# Altium PCB EnvUnitPCB.PcbDoc (part 1 of 4)
Units mm, origin at the board's own origin, x right, y up, seen from the top; angles counter-clockwise.
Board outline 110.5 x 67 mm, 4 copper layers (TOP, GND, VCC, BOT), stack 1.586 mm thick; 184 components, 135 nets, 655 pads, 1338 vias.
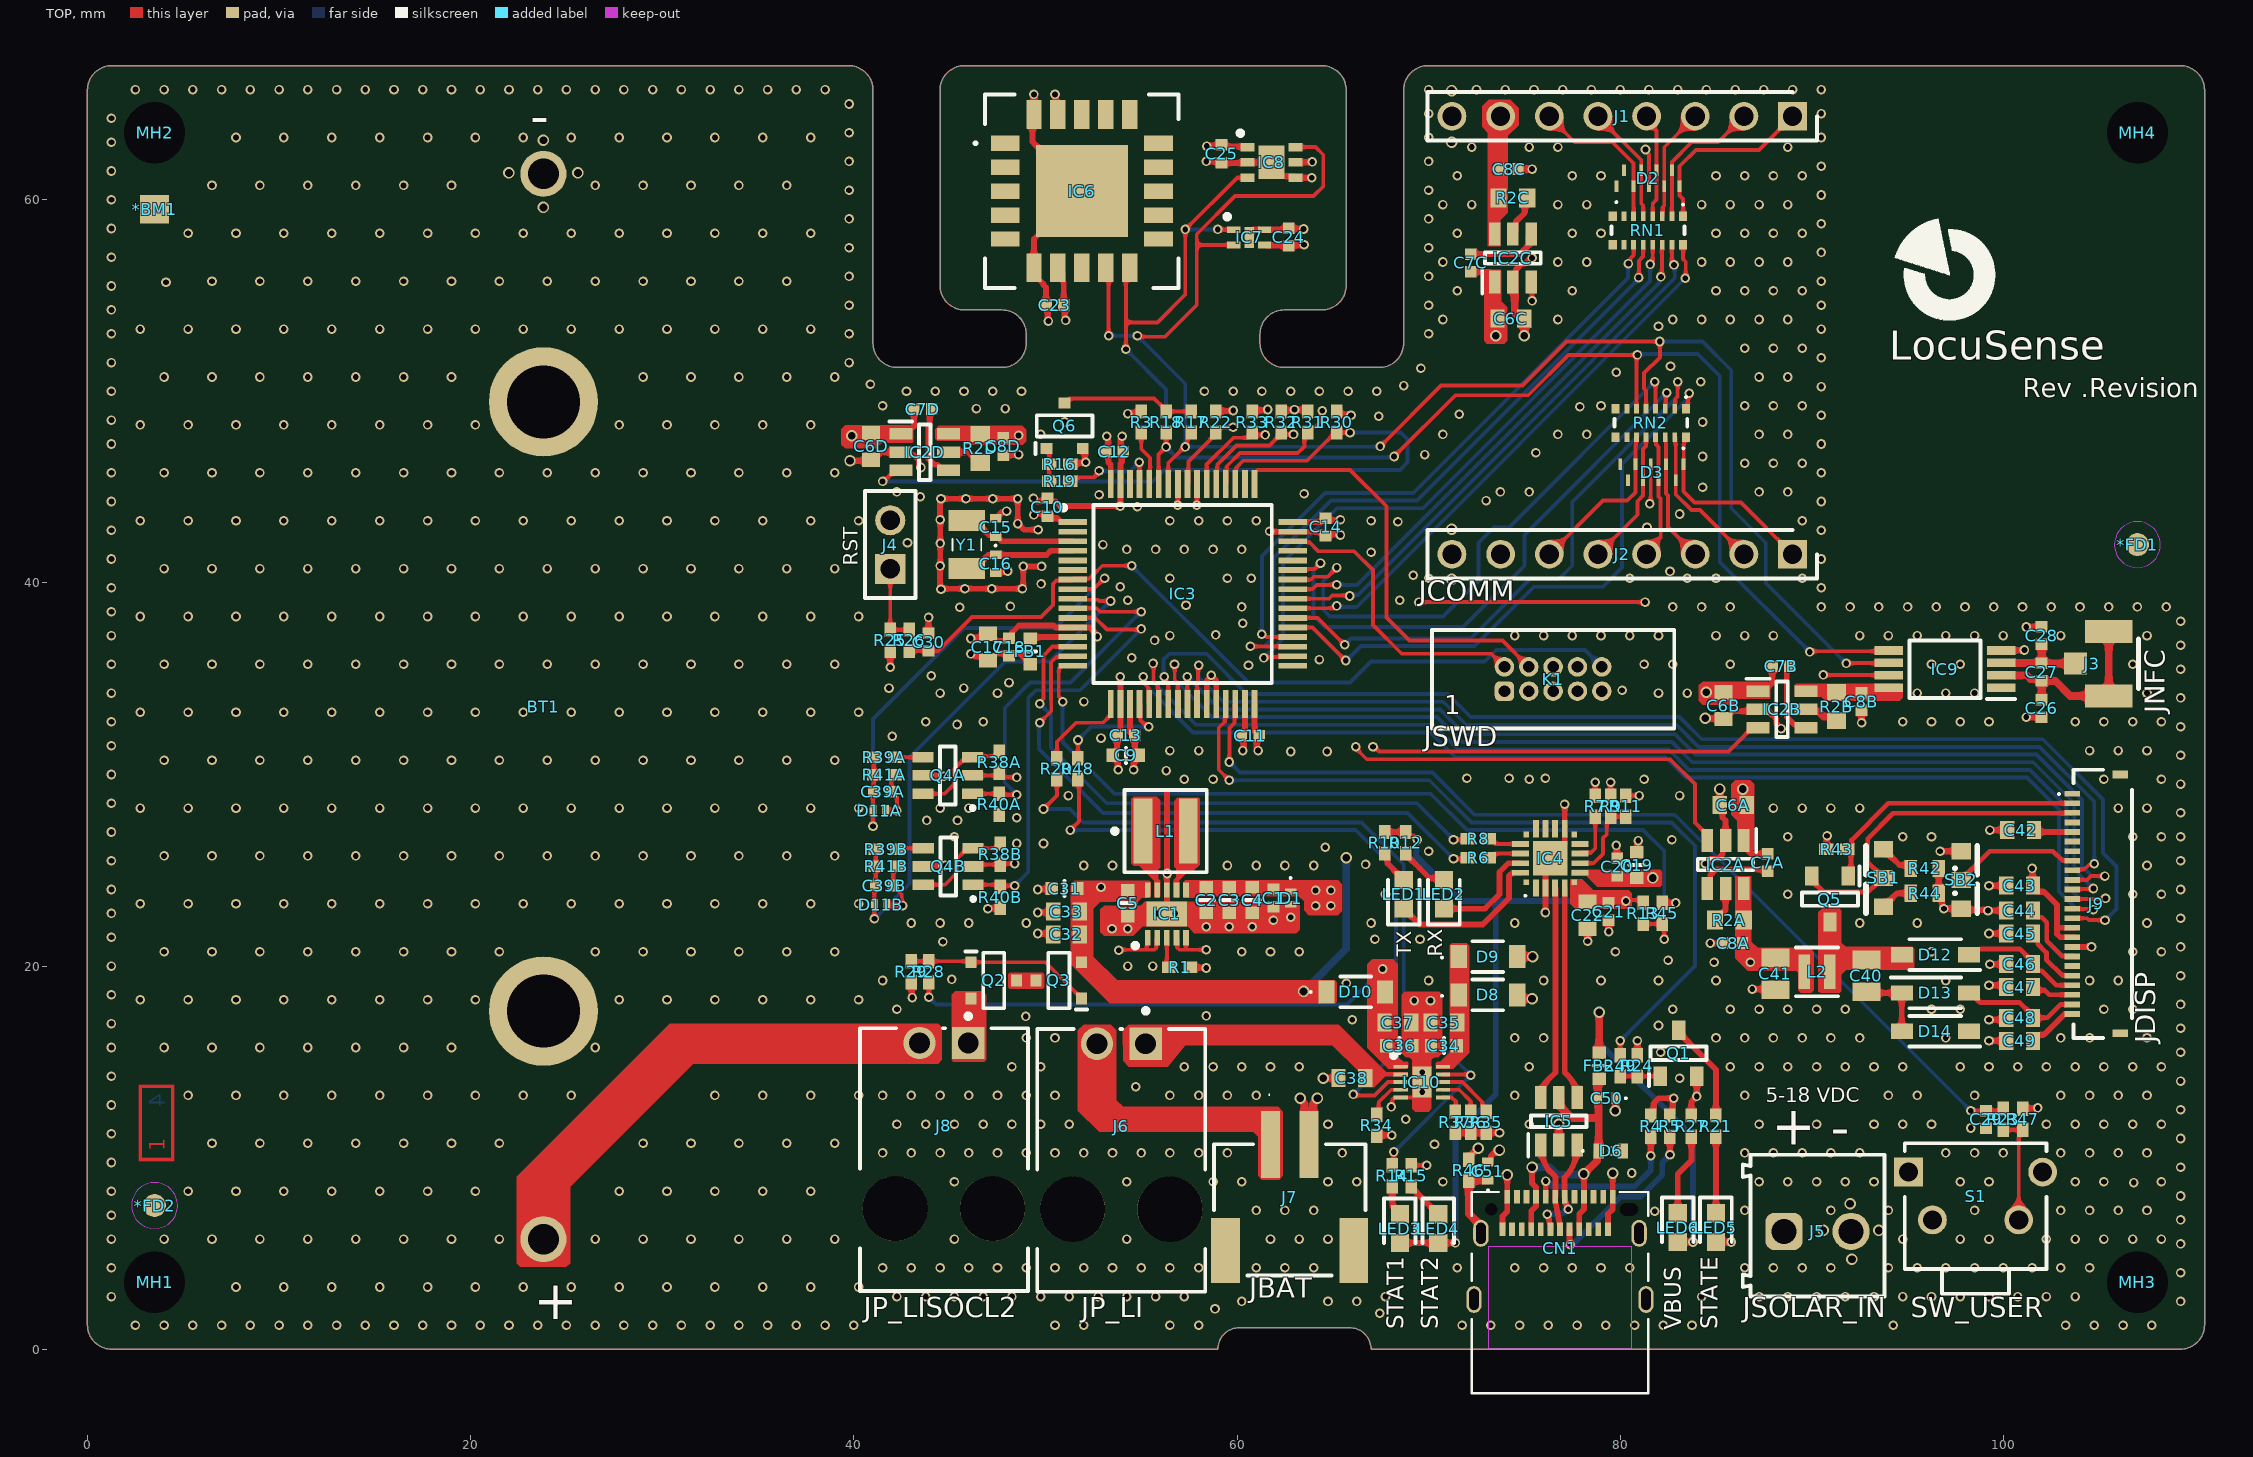
[diagram p0: TOP view]
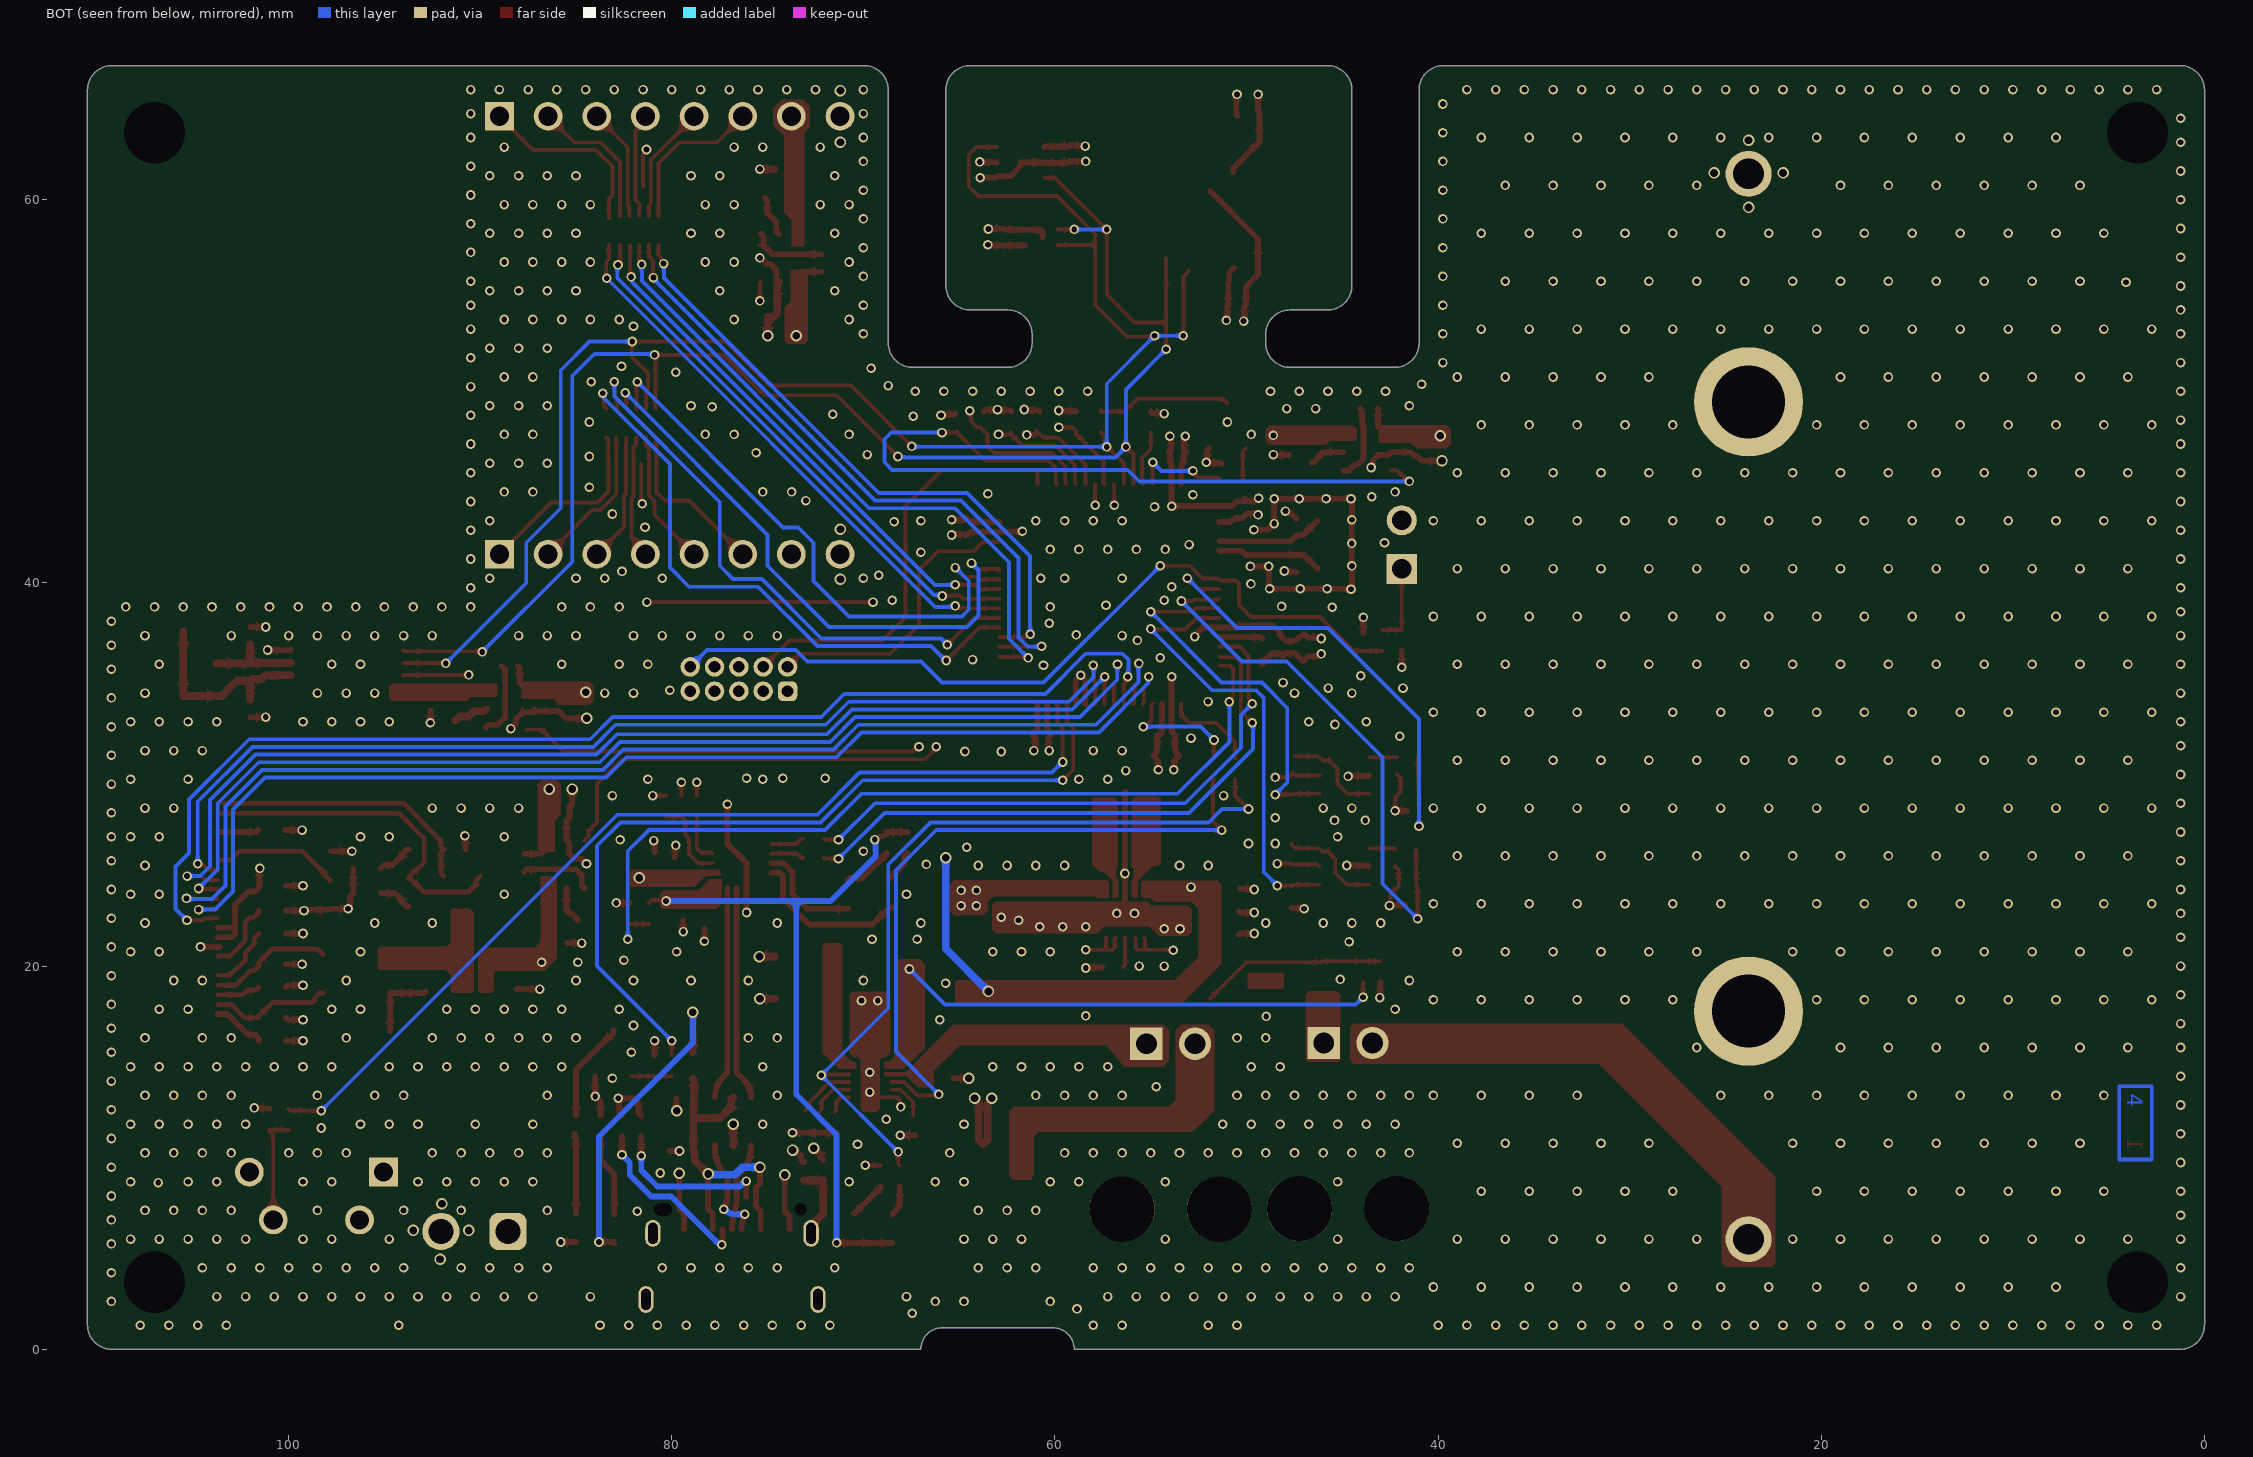
[diagram p1: BOT view, seen from below]
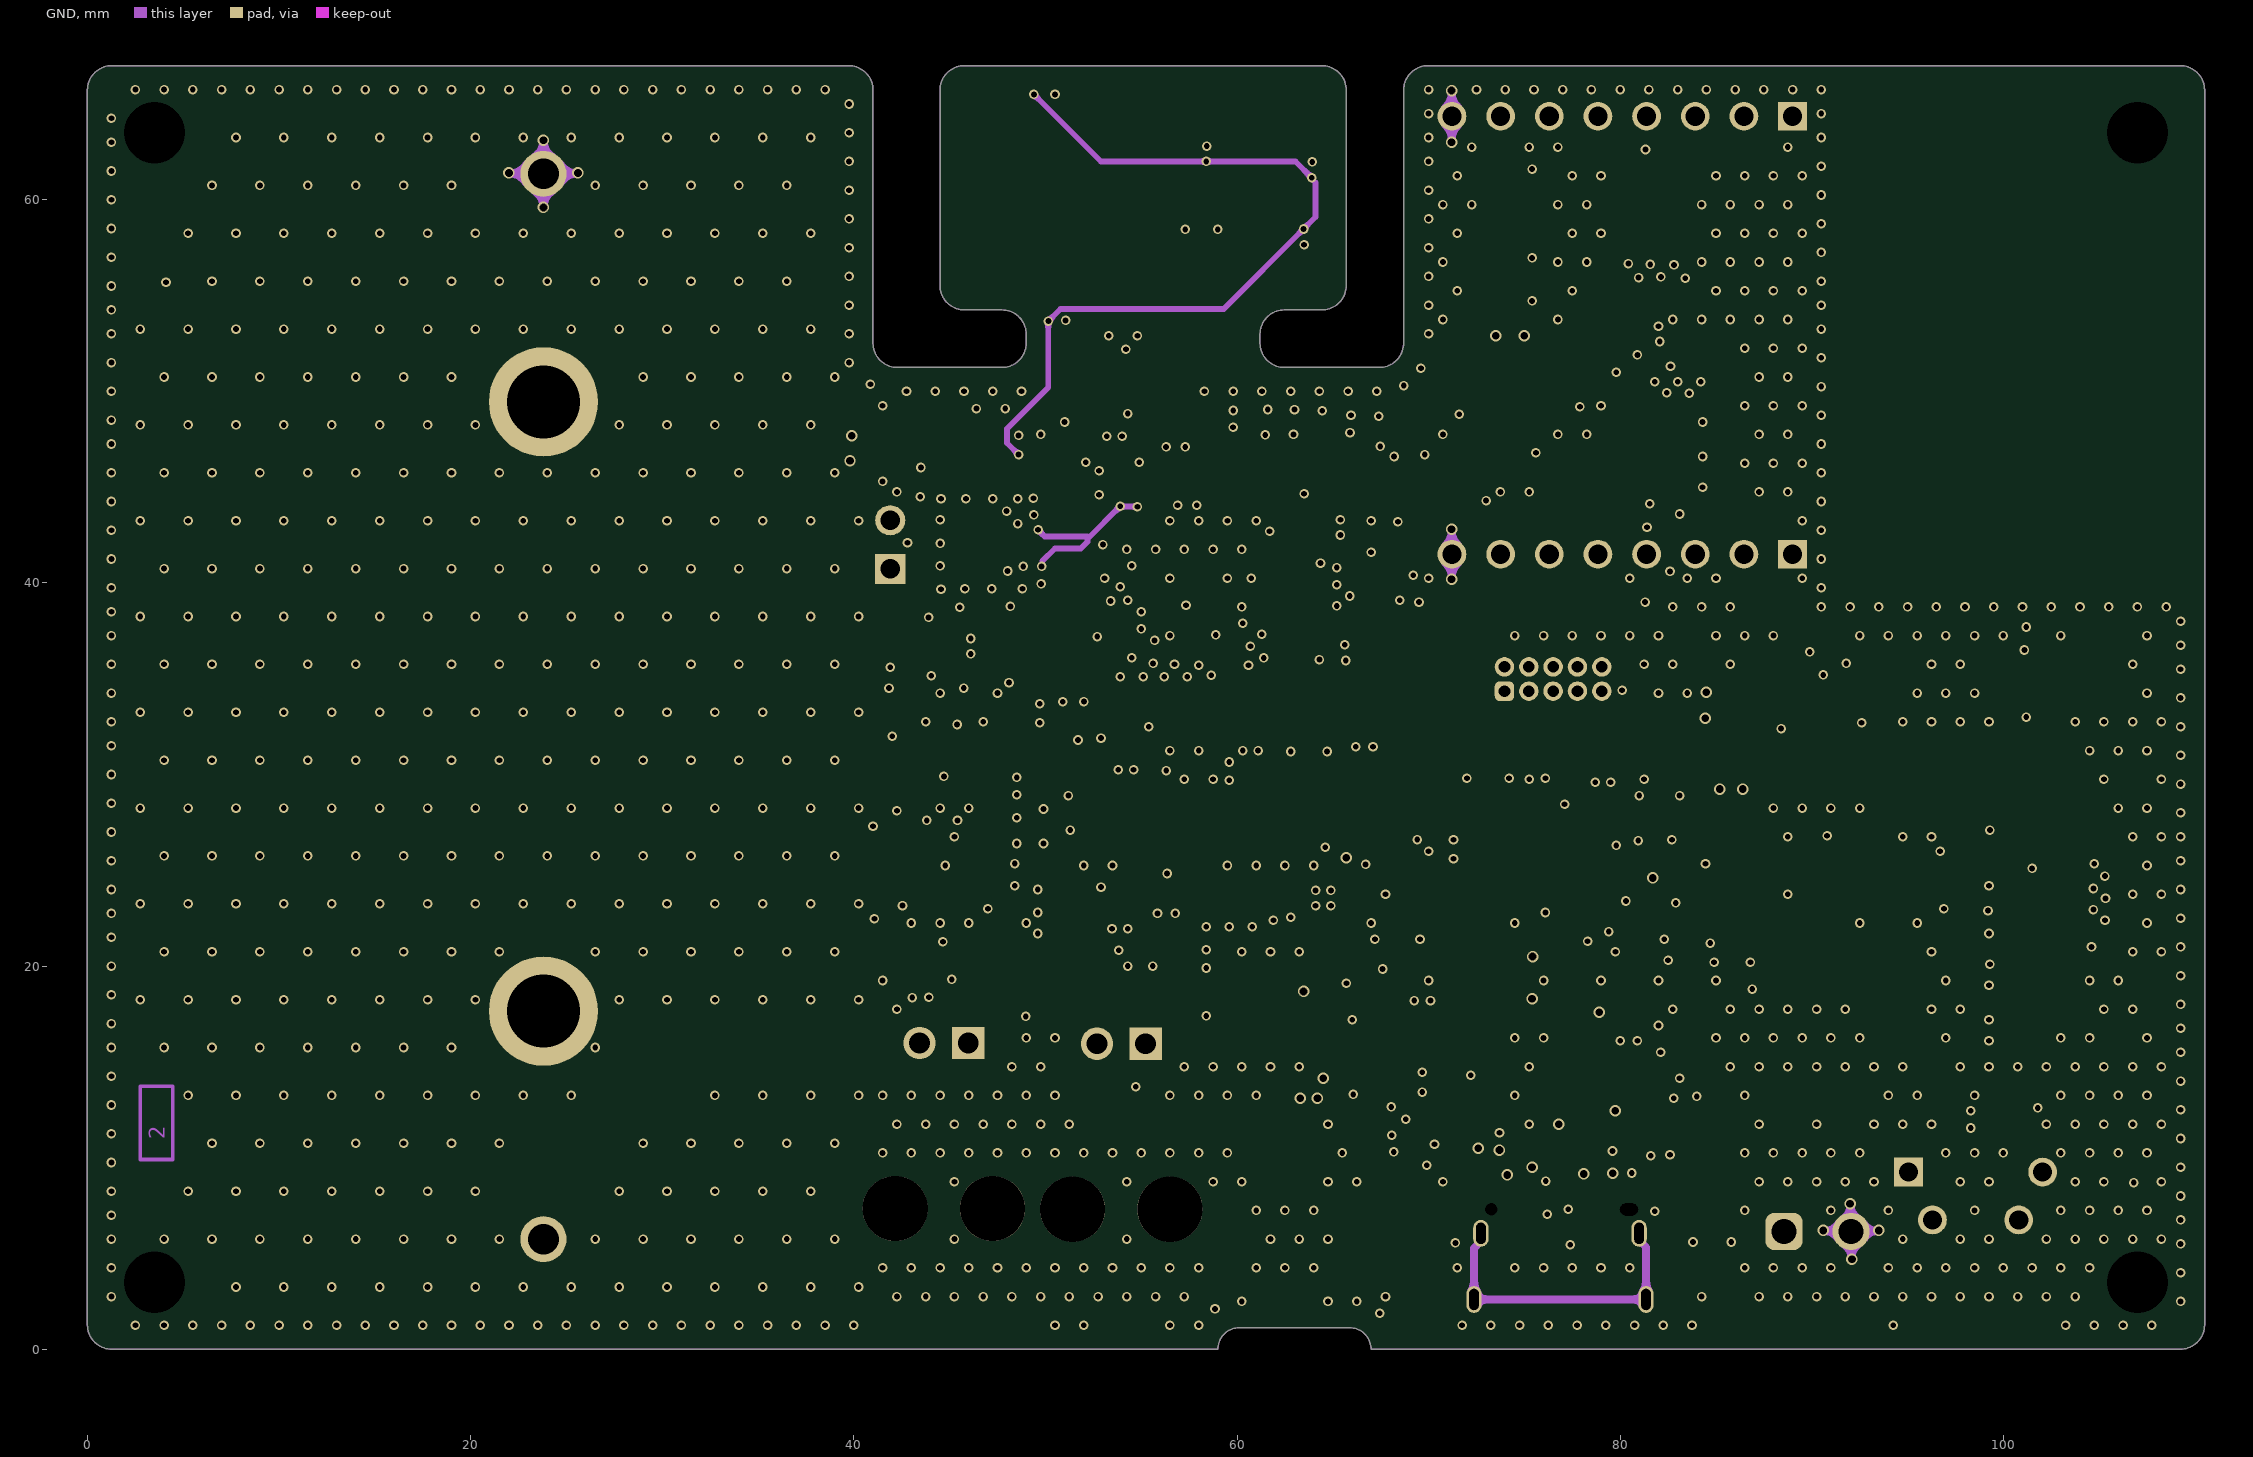
[diagram p2: GND]
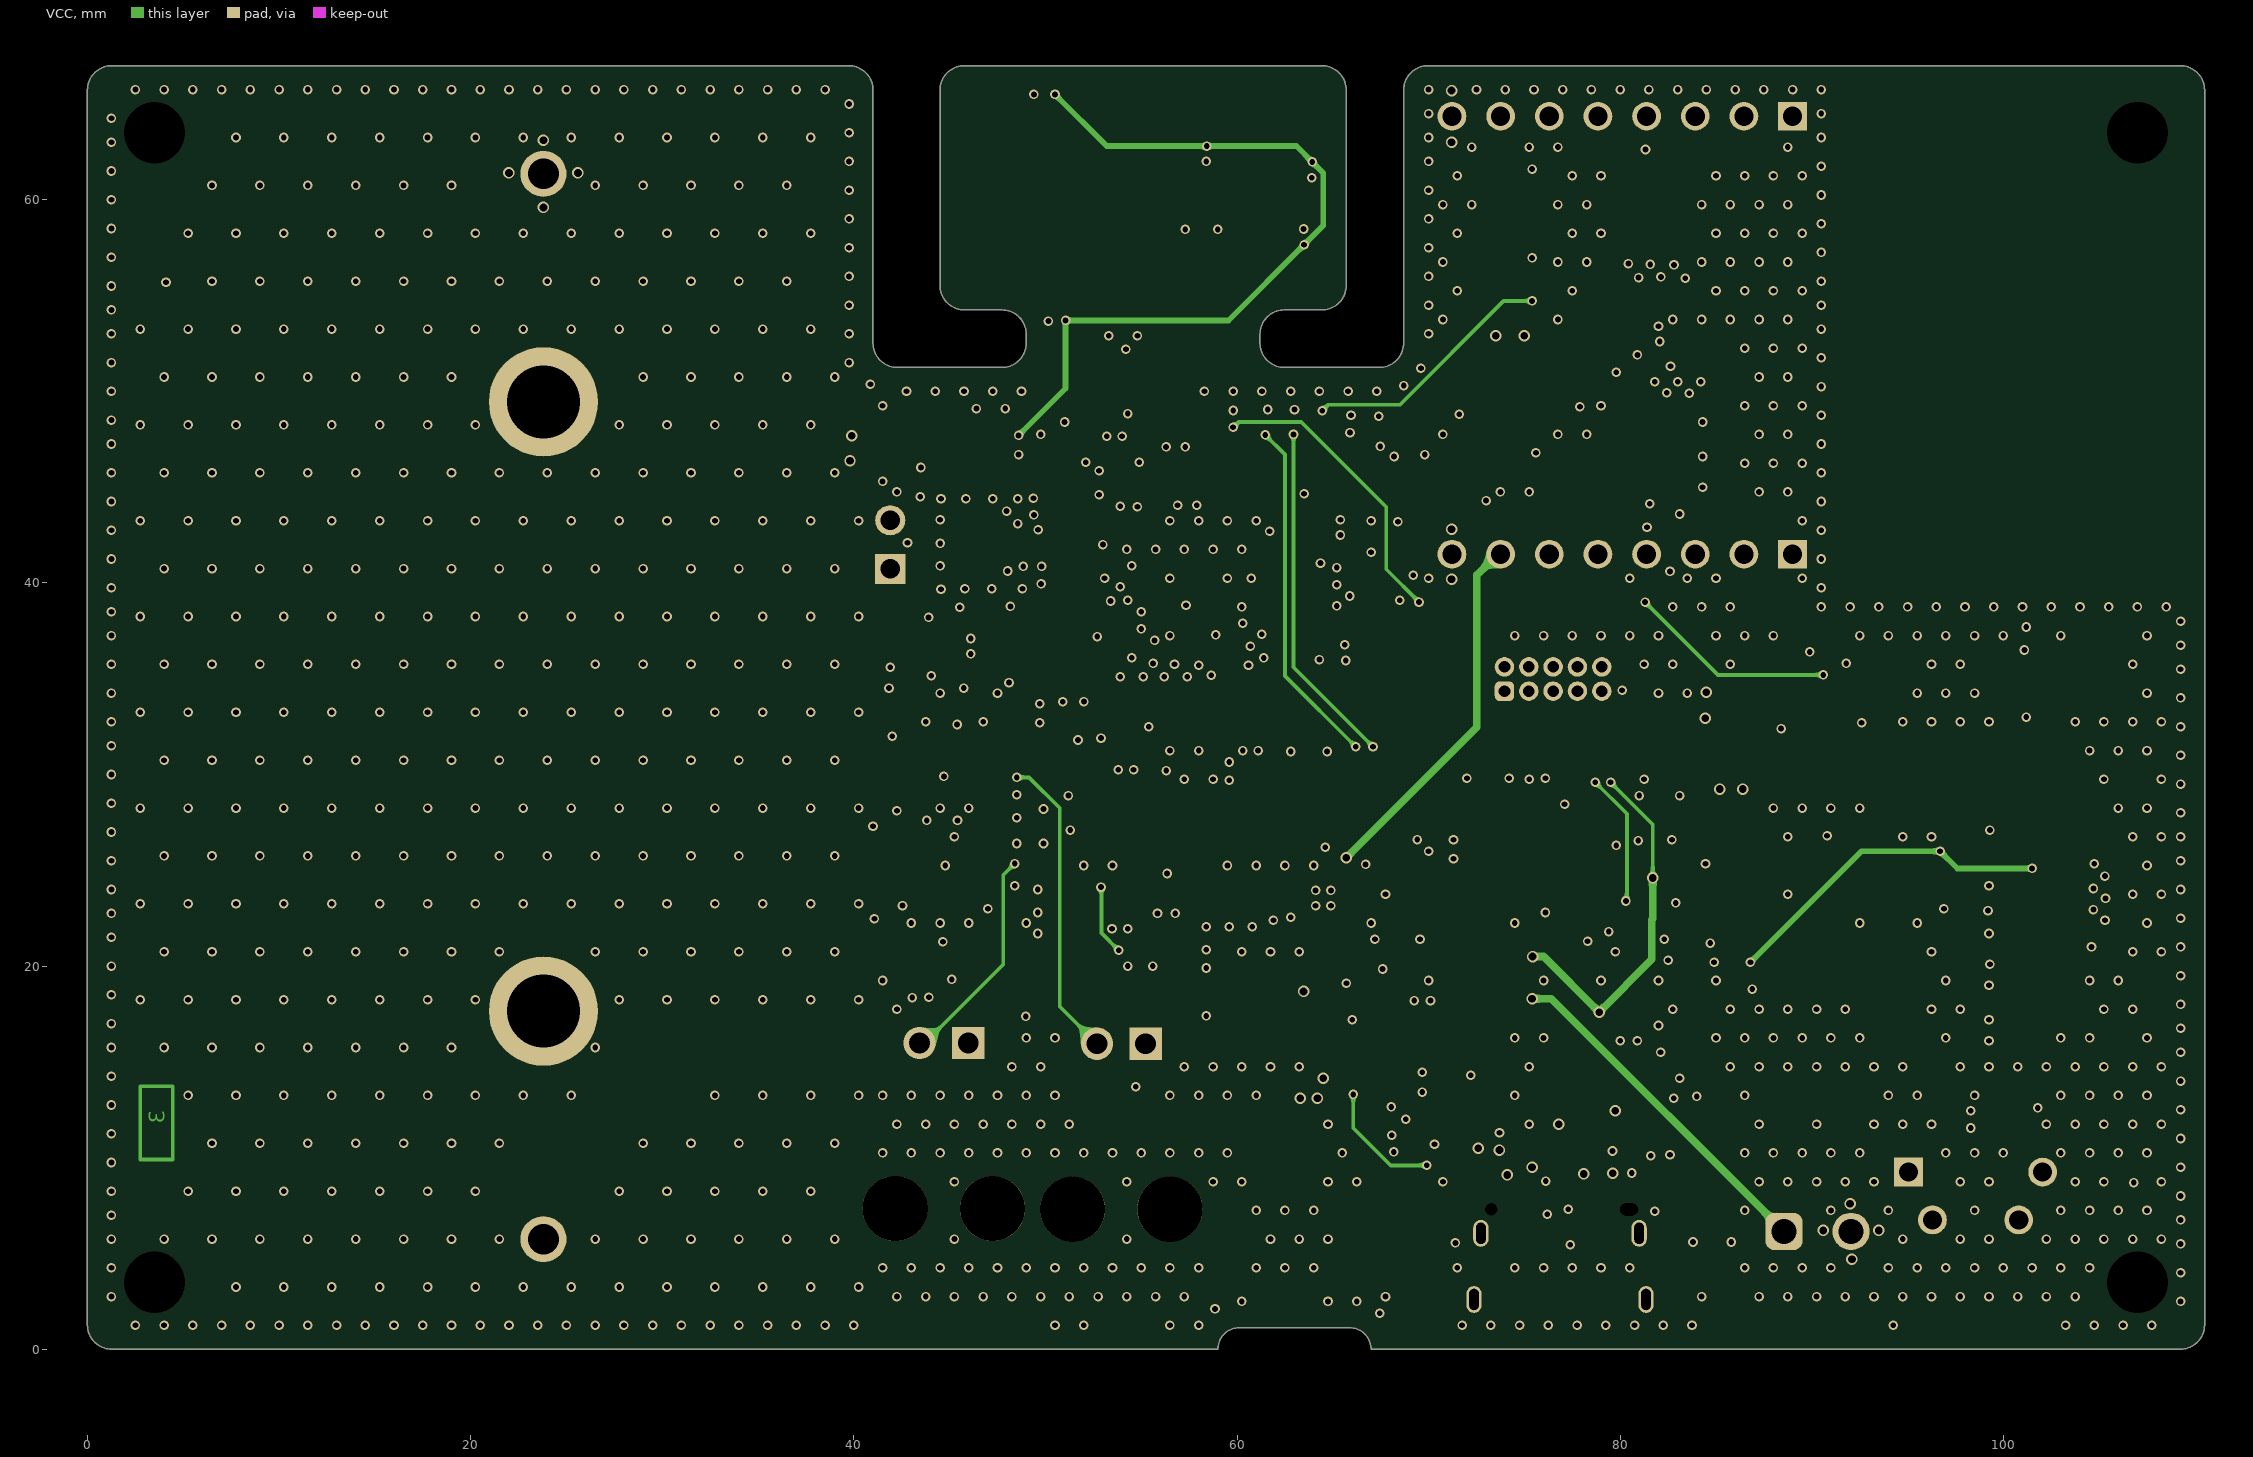
[diagram p3: VCC]

## Layer stack, top to bottom
Top Solder: solder mask 0.01, Solder Resist, Dk 3.5
TOP: signal copper 0.035
Dielectric 2: prepreg 0.2104, PP-006, Dk 4.1
GND: signal copper 0.0152
Dielectric 1: dielectric 1.065, FR-4, Dk 4.8
VCC: signal copper 0.0152
Dielectric 3: prepreg 0.2104, PP-006, Dk 4.1
BOT: signal copper 0.035
Bottom Solder: solder mask 0.01, Solder Resist, Dk 3.5

## Board outline
0,1.27 0,65.73 cw(c1.27,65.73) 1.27,67 39.73,67 cw(c39.73,65.73) 41,65.73 41,52.52 ccw(c42.27,52.52) 42.27,51.25 47.73,51.25 ccw(c47.73,52.52) 49,52.52 49,52.98 ccw(c47.73,52.98) 47.73,54.25 45.77,54.25 cw(c45.77,55.52) 44.5,55.52 44.5,65.73 cw(c45.77,65.73) 45.77,67 64.43,67 cw(c64.43,65.73) 65.7,65.73 65.7,55.52 cw(c64.43,55.52) 64.43,54.25 62.47,54.25 ccw(c62.47,52.98) 61.2,52.98 61.2,52.52 ccw(c62.47,52.52) 62.47,51.25 67.43,51.25 ccw(c67.43,52.52) 68.7,52.52 68.7,65.73 cw(c69.97,65.73) 69.97,67 108,67 109.23,67 cw(c109.23,65.73) 110.5,65.73 110.5,1.27 cw(c109.23,1.27) 109.23,0 67,0 ccw(c65.879,0) 65.879,1.121 60.121,1.121 ccw(c60.121,0) 59,0 1.27,0 cw(c1.27,1.27)

## Design rules (kind name [scope] priority, off if disabled: settings)
BoardOutlineClearance BoardOutlineClearance_ConnFids [InComponent('CON*') or InComponent('*FD*')] p1: gap=0.5 ignorepadtopadclearanceinfootprint=FALSE
BoardOutlineClearance [All] p2: gap=1 ignorepadtopadclearanceinfootprint=FALSE
Clearance Clearance_1 [InNetClass('USB')] p1: gap=0.1 ignorepadtopadclearanceinfootprint=FALSE
Clearance [All] p2: gap=0.2 ignorepadtopadclearanceinfootprint=FALSE except(0.254: Via-Via)
ComponentClearance ComponentClearance_TP [InComponent('TP*') vs InComponent('CON*')] p1: gap=0 collisioncheckmode=3 verticalgap=0 showdistances=FALSE
ComponentClearance ComponentClearance_CONN [InComponent('CON*') vs InComponent('CON*')] p2: gap=0 collisioncheckmode=3 verticalgap=0 showdistances=FALSE
ComponentClearance [All] p3: gap=0.254 collisioncheckmode=3 verticalgap=0.254 showdistances=FALSE
DiffPairsRouting [All] p1: maxlimit=0.177 minlimit=0.127 mostfreqgap=0.177 toplayer_mingap=0.177 toplayer_minwidth=0.3 toplayer_maxwidth=0.3 toplayer_prefwidth=0.3 midlayer1_maxgap=0.127 midlayer1_prefgap=0.127 midlayer1_minwidth=0.131 midlayer1_maxwidth=0.131 midlayer1_prefwidth=0.131 midlayer2_maxgap=0.127 midlayer2_prefgap=0.127 midlayer2_minwidth=0.131 midlayer2_maxwidth=0.131 midlayer2_prefwidth=0.131 bottomlayer_mingap=0.177 bottomlayer_minwidth=0.3 bottomlayer_maxwidth=0.3 bottomlayer_prefwidth=0.3 impedanceprofiledriven=TRUE impedanceprofileid={53C5FC8D-EA96-4982-8BD5-FB55FCDB1310} impedanceprofilevalue=90.000000 maxuncoupledlength=12.7
Height [All] p1: minheight=0 maxheight=100 prefheight=12.7
HoleSize [All] p1: absolutevalues=TRUE maxlimit=5 minlimit=0.2 maxpercent=80.000 minpercent=20.000
HoleToHoleClearance HoleToHoleClearance_usb_c [HasFootprint('CON_USB-TYPEC_AMPHENOL_12401826E412A')] p1: gap=0.3 allowstackedmicrovias=TRUE
HoleToHoleClearance [All] p2: gap=0.5 allowstackedmicrovias=TRUE
MatchedLengths [InDifferentialPair('USB')] p1: tolerance=25.4 checknetsindiffpair=FALSE checkdiffpairvsdiffpair=TRUE checkxsignals=TRUE checkothers=TRUE usedelayunits=TRUE delaytolerance=100.000000
MinimumAnnularRing [IsVia] p1: minimumring=0.1
MinimumAnnularRing MinimumAnnularRing_1 [All] p2: minimumring=0.15
MinimumAnnularRing MinimumAnnularRing_Protections [HasFootprint('PWSON-N06_2.0x2.0x0.8-0.65MM_DRV6_1') or HasFootprint('MSOP-8_PP_TI')] p3: minimumring=0.15
MinimumSolderMaskSliver [All] p1: minsoldermaskwidth=0.025
PasteMaskExpansion [All] p1: expansion=0.05
PolygonConnect PolygonConnect_Via [IsVia] p1: connectstyle=Direct reliefconductorwidth=0.3 reliefentries=4 polygonreliefangle="90 Angle" airgapwidth=0.3
PolygonConnect [All] p2: connectstyle=Relief reliefconductorwidth=0.2 reliefentries=4 polygonreliefangle="90 Angle" airgapwidth=0.2
RoutingCorners [All] p1: cornerstyle=45-Degree minsetback=1 maxsetback=1
RoutingVias [All] p1: holewidth=0.3 width=0.5 viastyle="Through Hole" minholewidth=0.2 minwidth=0.5 maxholewidth=0.5 maxwidth=1.5
SilkToSilkClearance [All] p1: silktosilkclearance=0.2
SilkToSolderMaskClearance [IsPad] p1: minsilkscreentomaskgap=0.125 clearancetoexposedcopper=TRUE
SolderMaskExpansion [All] p1: expansion=0.05 istentingtop=FALSE
SupplyNets "Schematic Supply Nets_6" [InNet('+5V')] p1: voltage=0.000
SupplyNets "Schematic Supply Nets_14" [InNet('VDC')] p2: voltage=0.000
SupplyNets "Schematic Supply Nets_13" [InNet('3V3')] p3: voltage=0.000
SupplyNets "Schematic Supply Nets_12" [InNet('VIN')] p4: voltage=0.000
SupplyNets "Schematic Supply Nets_11" [InNet('3V3_NFC')] p5: voltage=0.000
SupplyNets "Schematic Supply Nets_10" [InNet('GND')] p6: voltage=0.000
SupplyNets "Schematic Supply Nets_9" [InNet('P3V3')] p7: voltage=0.000
SupplyNets "Schematic Supply Nets_8" [InNet('3V3_RF')] p8: voltage=0.000
SupplyNets "Schematic Supply Nets_7" [InNet('VBAT_SO')] p9: voltage=0.000
SupplyNets "Schematic Supply Nets_5" [InNet('VBAT_LI')] p10: voltage=0.000
SupplyNets "Schematic Supply Nets_4" [InNet('3V3_SENS')] p11: voltage=0.000
SupplyNets "Schematic Supply Nets_3" [InNet('VDDA')] p12: voltage=0.000
SupplyNets "Schematic Supply Nets_2" [InNet('3V3_EINK')] p13: voltage=0.000
SupplyNets "Schematic Supply Nets_1" [InNet('VBUS')] p14: voltage=0.000
SupplyNets "Schematic Supply Nets" [InNet('VCCD')] p15: voltage=0.000
UnRoutedNet [All] p1: checkbadconnections=TRUE
Width [All] p1: maxlimit=1 minlimit=0.2 preferedwidth=0.2 minimp=50.000000 maximp=50.000000 favimp=50.000000
19 further rules are at their usual default settings.

## Classes and differential pairs
differential pair class USB: USB1 USB2
net class USB: USB1_N USB1_P USB2_N USB2_P
component class U_Mechanical: *BM1 *FD1 *FD2 MCH1 MH1 MH2 MH3 MH4
component class U_PowerSwitch1: C6A C7A C8A IC2A R2A
component class U_EInkHeader: C40 C41 C42 C43 C44 C45 C46 C47 C48 C49 D12 D13 D14 J9 L2 Q5 R42 R43 R44 SB1 SB2
channel class batteryDivider: U_batteryDivider1 U_batteryDivider2
component class U_BatteryManagement: C34 C35 C36 C37 C38 IC10 R34 R35 R36 R37
component class U_batteryDivider2: C39B D11B Q4B R38B R39B R40B R41B
component class U_batteryDivider1: C39A D11A Q4A R38A R39A R40A R41A
channel class PowerSwitch: U_PowerSwitch1 U_PowerSwitch2 U_PowerSwitch3 U_PowerSwitch4
component class U_Sensors: C23 C24 C25 IC6 IC7 IC8
component class U_RFHeader: D2 D3 J1 J2 RN1 RN2
component class U_Power: BT1 C31 C32 C33 D8 D9 D10 J5 J6 J7 J8 LED6 Q2 Q3 R27 R28 R29 R30 R31 R32 R33
component class U_PowerSwitch2: C6B C7B C8B IC2B R2B
component class U_PowerSwitch3: C6C C7C C8C IC2C R2C
component class U_PowerSwitch4: C6D C7D C8D IC2D R2D
component class U_NFC: C26 C27 C28 IC9 J3
component class main: C29 C30 J4 K1 LED3 LED4 LED5 Q1 Q6 R14 R15 R16 R17 R18 R19 R20 R21 R22 R23 R24 R25 R26 R47 R48 R49 S1
component class U_USBtoUART: C19 C20 C21 C22 C50 C51 CN1 D6 FB2 IC4 IC5 LED1 LED2 R4 R5 R6 R7 R8 R9 R10 R11 R12 R13 R45 R46
component class U_MCU: C9 C10 C11 C12 C13 C14 C15 C16 C17 C18 FB1 IC3 R3 Y1
component class U_BuckBoost: C1 C2 C3 C4 C5 D1 IC1 L1 R1
differential pair USB2: +USB2_P -USB2_N
differential pair USB1: +USB1_P -USB1_N

## Components (designator, comment, footprint, x,y, rotation, side; value= is the part's Value field where it differs from the comment)
*BM1 "BADMARK" BADMARK_BIG 3.5,59.5 r0 top
*FD1 "FIDUCIAL" FIDUCIAL 107,42 r0 top value=Fiducial
*FD2 "FIDUCIAL" FIDUCIAL 3.5,7.5 r0 top value=Fiducial
BT1 "BX0036" BX0036 23.8,17.65 r90 top
C1 "100nF" CAPC1005X70N 61.9,23.55 r90 top
C2 "10uF" GRM18X 58.4,23.45 r270 top
C3 "10uF" GRM18X 59.6,23.45 r270 top
C4 "10uF" GRM18X 60.8,23.45 r270 top
C5 "10uF" GRM18X 54.296,23.286 r270 top
C6A "1uF" CAPC1608X90N 85.9,28.4 r0 top (schematic designator C6)
C6B "1uF" CAPC1608X90N 85.4,33.6 r90 top (schematic designator C6)
C6C "1uF" CAPC1608X90N 74.3,53.8 r180 top (schematic designator C6)
C6D "1uF" CAPC1608X90N 40.9,47.125 r90 top (schematic designator C6)
C7A "1nF" CAPC1005X70N 87.7,25.4 r90 top (schematic designator C7)
C7B "1nF" CAPC1005X70N 88.4,35.65 r180 top (schematic designator C7)
C7C "1nF" CAPC1005X70N 72.2,56.7 r270 top (schematic designator C7)
C7D "1nF" CAPC1005X70N 43.6,49.075 r180 top (schematic designator C7)
C8A "100nF" CAPC1005X70N 85.9,21.2 r0 top (schematic designator C8)
C8B "100nF" CAPC1005X70N 92.6,33.81 r90 top (schematic designator C8)
C8C "100nF" CAPC1005X70N 74.2,61.6 r180 top (schematic designator C8)
C8D "100nF" CAPC1005X70N 47.8,47.125 r90 top (schematic designator C8)
C9 "10uF" GRM18X 54.2,31 r180 top
C10 "100nF" CAPC1005X70N 50.1,43.95 r270 top
C11 "100nF" CAPC1005X70N 60.689,32.022 r0 top
C12 "100nF" CAPC1005X70N 53.6,46.85 r180 top
C13 "100nF" CAPC1005X70N 54.2,32.05 r0 top
C14 "100nF" CAPC1005X70N 64.628,42.927 r90 top
C15 "6.8pF" GCM155 47.4,42.9 r90 top
C16 "6.8pF" GCM155 47.4,41 r270 top
C17 "1uF" CAPC1608X90N 47,36.65 r270 top
C18 "100nF" CAPC1005X70N 48.1,36.65 r270 top
C19 "10uF" GRM18X 80.875,25.275 r90 top
C20 "100nF" CAPC1005X70N 79.847,25.177 r270 top
C21 "100nF" CAPC1005X70N 79.4,22.85 r90 top
C22 "4.7uF" CAPC1608X90N 78.3,22.65 r270 top
C23 "100nF" CAPC1005X70N 50.5,54.5 r0 top
C24 "100nF" CAPC1005X70N 62.7,58.05 r270 top
C25 "100nF" CAPC1005X70N 59.2,62.4 r90 top
C26 "DNP" CAPC1005X70N 102,33.45 r90 top
C27 "4.7pF" CAPC1005X70N 102,35.35 r90 top
C28 "DNP" CAPC1005X70N 102,37.25 r90 top
C29 "100nF" CAPC1005X70N 99.1,12 r90 top
C30 "100nF" CAPC1005X70N 43.9,36.91 r270 top
C31 "10uF" GRM18X 51,24.05 r180 top
C32 "4.7uF" CAPC1608X90N 51.1,21.65 r180 top
C33 "4.7uF" CAPC1608X90N 51.1,22.85 r180 top
C34 "10uF" GRM18X 70.8,15.85 r180 top
C35 "4.7uF" CAPC1608X90N 70.8,17.05 r180 top
C36 "10uF" GRM18X 68.475,15.85 r0 top
C37 "4.7uF" CAPC1608X90N 68.4,17.05 r0 top
C38 "4.7uF" CAPC1608X90N 66,14.15 r180 top
C39A "100nF" CAPC1005X70N 41.5,29.1 r180 top (schematic designator C39)
C39B "100nF" CAPC1005X70N 41.6,24.2 r180 top (schematic designator C39)
C40 "4.7uF, 50V" CAPC2012X145N 92.85,19.5 r270 top
C41 "4.7uF, 50V" CAPC2012X145N 88.1,19.6 r270 top
C42 "1uF, 50V" CAPC1608X90N 100.9,27.1 r180 top
C43 "1uF, 50V" CAPC1608X90N 100.85,24.2 r180 top
C44 "1uF, 50V" CAPC1608X90N 100.85,22.9 r180 top
C45 "1uF, 50V" CAPC1608X90N 100.85,21.7 r180 top
C46 "1uF, 50V" CAPC1608X90N 100.85,20.1 r180 top
C47 "1uF, 50V" CAPC1608X90N 100.85,18.9 r180 top
C48 "1uF, 50V" CAPC1608X90N 100.85,17.3 r180 top
C49 "1uF, 50V" CAPC1608X90N 100.85,16.1 r180 top
C50 "10nF" GRM15X 79.3,13.1 r180 top
C51 "10nF" GRM15X 73.1,9.3 r90 top
CN1 "USB_TYPE_C_Receptacle" CON_USB-TYPEC_AMPHENOL_12401826E412A 76.86,7.3 r0 top value=USB_C_12401826E412A
D1 "SP3205-01ETG" SP320501ETG 62.8,23.55 r270 top
D2 "RCLAMP3328P.TZT" RCLAMP3328PTZT 81.5,61.125 r0 top
D3 "RCLAMP3328P.TZT" RCLAMP3328PTZT 81.6,45.775 r180 top
D6 "ESDA25P35-1U1M" ESDA25P351U1M 79.5,10.35 r180 top
D8 "RB161MM-20TR" RB161MM20TR 73.1,18.5 r90 top
D9 "RB161MM-20TR" RB161MM20TR 73.1,20.5 r90 top
D10 "RB168MM-40TFTR" RB168MM40TFTR 66.2,18.65 r90 top
D11A "SP3205-01ETG" SP320501ETG 41.325,28.1 r0 top (schematic designator D11)
D11B "SP3205-01ETG" SP320501ETG 41.4,23.2 r0 top (schematic designator D11)
D12 "MBR0530T1G" SOD3716X135N 96.45,20.6 r180 top
D13 "MBR0530T1G" SOD3716X135N 96.45,18.6 r0 top
D14 "MBR0530T1G" SOD3716X135N 96.45,16.6 r180 top
FB1 "33R" BLM18SP221SN1B 49.2,36.425 r90 top
FB2 "33R" BLM18SP221SN1B 78.9,14.8 r90 top
IC1 "TPS63900DSKR" SON50P250X250X80-11N-D 56.339,22.722 r90 top
IC2A "TPS22917DBVT" SOT95P280X145-6N 85.5,25.3 r270 top (schematic designator IC2)
IC2B "TPS22917DBVT" SOT95P280X145-6N 88.45,33.4 r0 top (schematic designator IC2)
IC2C "TPS22917DBVT" SOT95P280X145-6N 74.401,56.958 r90 top (schematic designator IC2)
IC2D "TPS22917DBVT" SOT95P280X145-6N 43.7,46.825 r0 top (schematic designator IC2)
IC3 "STM32U073RCT6" QFP50P1200X1200X160-64N 57.165,39.425 r0 top
IC4 "CP2102N-A02-GQFN20R" CP2102NA02GQFN20 76.353,25.625 r90 top
IC5 "USBLC6-2SC6" SOT95P280X145-6N 76.8,11.9 r90 top
IC6 "SCD41-D-R2" SCD41DR2 51.9,60.45 r0 top
IC7 "SHT40-AD1B-R2" SON80P150X150X59-5N 60.637,58.041 r0 top
IC8 "SGP40-D-R4" SON80P244X244X95-7N 61.8,61.95 r0 top
IC9 "ST25DV64KC-IE8T3" SOP65P640X120-8N 96.95,35.5 r180 top
IC10 "BQ25185DLHR" SON40P220X200X80-11N 69.65,13.95 r0 top
J1 "M20-7820842" RHDR8W80P0X254_1X8_2032X254X850P 89,64.36 r180 top locked
J2 "M20-7820842" RHDR8W80P0X254_1X8_2032X254X850P 89,41.5 r180 top locked
J3 "ANT1" RECE.20279.001E.01 105.5,35.785 r270 top
J4 "M20-9990246" FP-M20-9990246-MFG 41.9,42 r90 top
J5 "691214110002" 691214110002 90.3,6.45 r0 top
J6 "70551-0001" FP-70551-0036-MFG 53.96,9.865 r180 top
J7 "1769" 1769 62.75,10.7 r0 top
J8 "70551-0001" FP-70551-0036-MFG 44.7,9.9 r180 top
J9 "F3311A7H121024E200" F3311A7H121024E200 105.195,23.25 r90 top
K1 "3220-10-0100-00" TH_CON_MHDR2X5_PIT50_KEY 76.5,34.985 r0 top value="ARM JTAG 10"
L1 "2.2uH" FP-XFL4020-MFG 56.275,27.05 r0 top
L2 "10uH" FP-EPL2010_H1_05-MFG 90.275,19.7 r0 top
LED1 "150060GS75000" LEDC1608X80N 68.7,23.75 r90 top
LED2 "150060GS75000" LEDC1608X80N 70.8,23.75 r90 top
LED3 "150060YS75000" LEDC1608X80N 68.5,6.3 r270 top
LED4 "RED" LEDC1608X80N 70.5,6.3 r270 top
LED5 "RED" LEDC1608X80N 85,6.35 r270 top
LED6 "150060GS75000" LEDC1608X80N 83,6.35 r270 top
MH1 "3.2/3.4mm NP" TH_MH3.2/3.4NP 3.5,3.5 r0 top locked
MH2 "3.2/3.4mm NP" TH_MH3.2/3.4NP 3.5,63.5 r0 top locked
MH3 "3.2/3.4mm NP" TH_MH3.2/3.4NP 107,3.5 r0 top locked
MH4 "3.2/3.4mm NP" TH_MH3.2/3.4NP 107,63.5 r0 top locked
Q1 "BSS138" SOT95P240X120-3N 83.05,15.45 r90 top
Q2 "SSM3J358R,LF" SOTFL95P240X88-3N 47.305,19.25 r0 top
Q3 "SSM3J358R,LF" SOTFL95P240X88-3N 50.7,19.25 r180 top
Q4A "SI3552DV-T1-GE3" SOT95P284X110-6N 44.9,29.95 r180 top (schematic designator Q4)
Q4B "SI3552DV-T1-GE3" SOT95P284X110-6N 44.925,25.2 r180 top (schematic designator Q4)
Q5 "BSS138" SOT95P240X120-3N 90.95,23.5 r270 top
Q6 "SSM3J358R,LF" SOTFL95P240X88-3N 51,48.2 r90 top
R1 "36.5k" RESC1005X35N 57,19.95 r180 top
R2A "100R" RESC1608X55N 85.7,22.4 r0 top (schematic designator R2)
R2B "100R" RESC1608X55N 91.3,33.55 r90 top (schematic designator R2)
R2C "100R" RESC1608X55N 74.4,60.1 r180 top (schematic designator R2)
R2D "100R" RESC1608X55N 46.6,47.025 r90 top (schematic designator R2)
R3 "100k" RESC1005X35N 55,48.4 r270 top
R4 "5.1k" RESC1005X35N 81.6,11.65 r270 top
R5 "5.1k" RESC1005X35N 82.6,11.65 r270 top
R6 "1k" RESC1005X35N 72.6,25.65 r0 top
R7 "1k" RESC1005X35N 78.7,28.35 r90 top
R8 "1k" RESC1005X35N 72.6,26.65 r0 top
R9 "100k" RESC1005X40N 79.5,28.35 r270 top
R10 "1k" RESC1005X35N 67.7,26.45 r270 top
R11 "330k" RESC1005X40N 80.3,28.35 r270 top
R12 "1k" RESC1005X35N 68.8,26.45 r270 top
R13 "1k" RESC1005X35N 81.2,22.75 r90 top
R14 "1k" RESC1005X35N 68.1,9.05 r90 top
R15 "1k" RESC1005X35N 69.1,9.05 r90 top
R16 "1M" RESC1005X40N 50.75,46.2 r180 top
R17 "5.1k" RESC1005X35N 57.6,48.4 r90 top
R18 "5.1k" RESC1005X35N 56.3,48.4 r90 top
R19 "10k" RESC1005X35N 50.75,45.3 r0 top
R20 "10k" RESC1005X35N 50.6,30.3 r90 top
R21 "1k" RESC1005X35N 85,11.65 r90 top
R22 "330k" RESC1005X40N 58.9,48.4 r90 top
R23 "1k" RESC1005X35N 100,12 r270 top
R24 "1M" RESC1005X40N 80.9,14.8 r270 top
R25 "100k" RESC1005X35N 41.9,37 r90 top
R26 "1k" RESC1005X35N 42.9,37 r90 top
R27 "1k" RESC1005X35N 83.717,11.65 r90 top
R28 "1k" RESC1005X35N 43.919,19.7 r90 top
R29 "1M" RESC1005X40N 42.999,19.701 r90 top
R30 "1M" RESC1005X40N 65.2,48.4 r270 top
R31 "1M" RESC1005X40N 63.7,48.4 r270 top
R32 "1M" RESC1005X40N 62.3,48.4 r270 top
R33 "1M" RESC1005X40N 60.8,48.4 r270 top
R34 "10k" RESC1005X35N 67.3,11.7 r270 top
R35 "604" RESC1005X35N 73,11.85 r270 top
R36 "13k" RESC1005X35N 72.2,11.85 r90 top
R37 "10k" RESC1005X35N 71.4,11.85 r270 top
R38A "100k" RESC1005X35N 47.6,30.65 r270 top (schematic designator R38)
R38B "100k" RESC1005X35N 47.65,25.85 r270 top (schematic designator R38)
R39A "100k" RESC1005X40N 41.6,30.9 r180 top (schematic designator R39)
R39B "100k" RESC1005X40N 41.7,26.1 r180 top (schematic designator R39)
R40A "1M" RESC1005X40N 47.6,28.45 r90 top (schematic designator R40)
R40B "1M" RESC1005X40N 47.65,23.6 r90 top (schematic designator R40)
R41A "330k" RESC1005X40N 41.6,30 r180 top (schematic designator R41)
R41B "330k" RESC1005X40N 41.7,25.2 r180 top (schematic designator R41)
R42 "0.47" ERJ3_B_BQ_BW_LW_(0603) 95.9,25.1 r180 top
R43 "100k" RESC1005X35N 91.3,26.1 r0 top
R44 "3.0" ERJ3_B_BQ_BW_LW_(0603) 95.9,23.8 r180 top
R45 "100k" RESC1005X40N 82.2,22.75 r270 top
R46 "1M" RESC1005X40N 72.1,9.35 r90 top
R47 "330k" RESC1005X40N 101,12 r90 top
R48 "10k" RESC1005X35N 51.7,30.3 r90 top
R49 "10k" RESC1005X35N 80,14.8 r270 top
RN1 "240R" EXBU2H 81.45,58.4 r180 top
RN2 "240R" EXBU2H 81.6,48.35 r180 top
S1 "431256038716" 431256038716 95.05,9.25 r0 top
SB1 "SP0603_RIGHT" SP0603-RIGHT 93.75,25.35 r90 top
SB2 "SP0603_RIGHT" SP0603-RIGHT 97.8,25.25 r90 top
Y1 "32kHz" ECS32712534RRTR 45.9,42 r90 top

## Footprints (in the part's own frame and the unit in brackets; to place one, negate y for a bottom-side part, rotate by r counter-clockwise, add the part's x,y. Pads: shape width x height; smd on the part's side, far side on the other; paste and mask are expansions set on the pad)
1769 [mm]
  rect 1x3.5 smd: 1(-1,0) 2(1,0)
  rect 1.5x3.4 smd: 3(-3.35,-5.55) 4(3.35,-5.55)
  silkscreen extent -3.95,-6.85 3.95,2.61, body extent -3.95,-7.07 3.95,1.53, height 4.8
431256038716 [mm]
  rect 1.5x1.5 hole 1: 1(0,0)
  round 1.5 hole 1: 2(1.25,-2.5) 3(5.75,-2.5) 4(7,0)
  silkscreen extent -1.3,-6.35 7.2,1.5, body extent -0.7,-6.35 7.7,1.5, height 7.2
691214110002 [mm] "3.50 mm Horizontal Entry Modular, 2p"
  rrect50% 1.95x1.95 hole 1.3: 1(-1.75,-0.3)
  round 1.95 hole 1.3: 2(1.75,-0.3)
  silkscreen extent -3.9,-3.7 3.5,3.7, body extent -3.95,-3.7 3.5,3.7, height 8.55
BADMARK_BIG [mm]
  rect 1.5x1.5 smd paste-10 mask+0.1: 1(0,0)
  body extent -0.75,-0.75 0.75,0.75, height 0.05
BLM18SP221SN1B [mm]
  rect 0.65x0.7 smd: 1(-0.675,0) 2(0.675,0)
  silkscreen extent 0,-0.3 0,0.3, body extent -0.8,-0.4 0.8,0.4, height 0.8
BX0036 [mm]
  round 5.7 hole 3.8: 1(0,0) 2(31.8,0)
  round 2.4 hole 1.6: MH1(-11.9,0) MH2(43.7,0)
  body extent -13.6,-17 45.4,16.97, height 33.68
CAPC1005X70N [mm]
  rect 0.6x0.62 smd: 1(-0.46,0) 2(0.46,0)
  body extent -0.5,-0.25 0.5,0.25, height 0.25
CAPC1608X90N [mm]
  rect 0.75x0.94 smd: 1(-0.7,0) 2(0.7,0)
  body extent -0.8,-0.45 0.8,0.45, height 0.8
CAPC2012X145N [mm]
  rect 0.97x1.47 smd: 1(-0.83,0) 2(0.83,0)
  body extent -1,-0.63 1,0.63, height 1.45
CON_USB-TYPEC_AMPHENOL_12401826E412A [mm]
  round 0 hole 0.65 unplated mask+0.05: 0(-3.6,0)
  round 0 hole 0.65 slot 0.95 at 0 deg unplated mask+0.05: 0(3.6,0)
  rect 0.3x0.7 smd mask+0.05: A1(-2.75,0.66) A2(-2.25,0.66) A3(-1.75,0.66) A4(-1.25,0.66) A5(-0.75,0.66) A6(-0.25,0.66) A7(0.25,0.66) A8(0.75,0.66) A9(1.25,0.66) A10(1.75,0.66) A11(2.25,0.66) A12(2.75,0.66) B1(2.5,-1.04) B2(2,-1.04) B3(1.5,-1.04) B4(1,-1.04) B5(0.5,-1.04) B6(0,-1.04) B7(-0.5,-1.04) B8(-1,-1.04) B9(-1.5,-1.04) B10(-2,-1.04) B11(-2.5,-1.04) B12(-3,-1.04)
  oval 0.8x1.4 hole 0.5 slot 1.1 at 90 deg mask+0.05: SH1(-4.13,-1.25) SH2(4.13,-1.25) SH3(-4.49,-4.7) SH4(4.49,-4.7)
  TOP keep-out region: -3.75,-7.24 3.75,-7.24 3.75,-1.95 -3.75,-1.95
  silkscreen extent -4.6,-9.59 4.6,0.91, body extent -4.6,-9.59 4.6,0.91, height 3.25
CP2102NA02GQFN20 [mm]
  rect 0.3x0.3 smd: 1(-1.25,1.25) 6(-1.25,-1.25) 11(1.25,-1.25) 16(1.25,1.25)
  rect 0.9x0.3 smd: 2(-1.55,0.75) 3(-1.55,0.25) 4(-1.55,-0.25) 5(-1.55,-0.75) 12(1.55,-0.75) 13(1.55,-0.25) 14(1.55,0.25) 15(1.55,0.75)
  rect 0.3x0.9 smd: 7(-0.75,-1.55) 8(-0.25,-1.55) 9(0.25,-1.55) 10(0.75,-1.55) 17(0.75,1.55) 18(0.25,1.55) 19(-0.25,1.55) 20(-0.75,1.55)
  rect 1.8x1.8 smd: 21(0,0)
  silkscreen extent -2,1.25 -1.9,1.35, body extent -1.5,-1.5 1.5,1.5, height 0.75
ECS32712534RRTR [mm]
  rect 1.1x1.9 smd: 1(-1.25,0) 2(1.25,0)
  silkscreen extent -0.3,-0.75 0.3,0.75, body extent -1.6,-0.75 1.6,0.75, height 0.9
ERJ3_B_BQ_BW_LW_(0603) [mm]
  rect 0.65x0.9 smd: 1(-0.725,0) 2(0.725,0)
  silkscreen extent -1.63,-0.05 -1.53,0.05, body extent -0.8,-0.4 0.8,0.4, height 0.55
ESDA25P351U1M [mm]
  rect 0.55x0.8 smd: 1(0.625,0) 2(-0.625,0)
  silkscreen extent 1.4,-0.05 1.5,0.05, body extent -0.8,-0.5 0.8,0.5, height 0.57
EXBU2H [mm]
  rect 0.425x0.5 smd: 1(-1.837,-0.75) 8(1.837,-0.75) 9(1.837,0.75) 16(-1.837,0.75)
  rect 0.25x0.5 smd: 2(-1.25,-0.75) 3(-0.75,-0.75) 4(-0.25,-0.75) 5(0.25,-0.75) 6(0.75,-0.75) 7(1.25,-0.75) 10(1.25,0.75) 11(0.75,0.75) 12(0.25,0.75) 13(-0.25,0.75) 14(-0.75,0.75) 15(-1.25,0.75)
  silkscreen extent -1.9,-1.4 1.9,0.2, body extent -1.9,-0.8 1.9,0.8, height 0.55
F3311A7H121024E200 [mm]
  rect 0.3x0.8 smd: 1(5.75,1.595) 2(5.25,1.595) 3(4.75,1.595) 4(4.25,1.595) 5(3.75,1.595) 6(3.25,1.595) 7(2.75,1.595) 8(2.25,1.595) 9(1.75,1.595) 10(1.25,1.595) 11(0.75,1.595) 12(0.25,1.595) 13(-0.25,1.595) 14(-0.75,1.595) 15(-1.25,1.595) 16(-1.75,1.595) 17(-2.25,1.595) 18(-2.75,1.595) 19(-3.25,1.595) 20(-3.75,1.595) 21(-4.25,1.595) 22(-4.75,1.595) 23(-5.25,1.595) 24(-5.75,1.595)
  rect 0.4x0.8 smd: MP1(-6.75,-0.905) MP2(6.75,-0.905)
  silkscreen extent -7,-1.53 7,2.34, body extent -6.99,-1.47 7,1.83, height 1.42
FIDUCIAL [mm]
  round 1.27 on Mech16: 0(0,0)
  round 1.2 smd paste-10 mask+0.6: ""(0,0)
  TOP keep-out circle w0: c0,0 r1.2
  body extent -1.19,-1.2 1.2,1.2, height 0.05
FP-70551-0036-MFG [mm]
  rect 1.69x1.69 hole 1.09 paste-2539.97 mask+0: 1(-1.27,-6.085)
  round 1.69 hole 1.09 paste-2539.97 mask+0: 2(1.27,-6.085)
  round 3.4 hole 3.4 unplated paste-2539.97 mask+0: ""(-2.54,2.555) ""(2.54,2.555)
  silkscreen extent -4.39,-7.92 4.39,6.86, body extent -4.48,-7.03 4.48,6.96, height 0.25
FP-EPL2010_H1_05-MFG [mm]
  rect 0.6x1.8 smd paste+0 mask+0: 1(-0.675,0) 2(0.675,0)
  silkscreen extent -1.1,-1.28 1.1,1.28, body extent -1,-1 1,1, height 1.05
FP-M20-9990246-MFG [mm]
  rect 1.57x1.57 hole 1.02 paste-2539.97 mask+0: 1(-1.27,0)
  round 1.57 hole 1.02 paste-2539.97 mask+0: 2(1.27,0)
  silkscreen extent -2.79,-1.32 2.79,1.32, body extent -2.89,-1.42 2.89,1.42, height 0.25
FP-XFL4020-MFG [mm]
  rect 0.98x3.4 smd paste+0 mask+0: 1(-1.185,0) 2(1.185,0)
  silkscreen extent -2.77,-2.15 2.15,2.15, body extent -2,-2 2,2, height 2.23
GCM155 [mm]
  rect 0.45x0.6 smd: 1(-0.475,0) 2(0.475,0)
  silkscreen extent -1,-0.05 -0.9,0.05, body extent -0.5,-0.28 0.5,0.27, height 0.5
GRM15X [mm]
  rect 0.45x0.6 smd: 1(-0.475,0) 2(0.475,0)
  silkscreen extent -1.05,-0.05 -0.95,0.05, body extent -0.5,-0.28 0.5,0.27, height 0.5
GRM18X [mm]
  rect 0.65x0.7 smd: 1(-0.675,0) 2(0.675,0)
  silkscreen extent 0,-0.4 0,0.4, body extent -0.8,-0.45 0.8,0.45, height 0.8
LEDC1608X80N [mm]
  rect 0.95x0.95 smd: 1(-0.75,0) 2(0.75,0)
  silkscreen extent -1.58,-0.82 0.75,0.82, body extent -0.83,-0.4 0.77,0.4, height 0.7
QFP50P1200X1200X160-64N [mm]
  rect 1.475x0.3 smd: 1(-5.738,3.75) 2(-5.738,3.25) 3(-5.738,2.75) 4(-5.738,2.25) 5(-5.738,1.75) 6(-5.738,1.25) 7(-5.738,0.75) 8(-5.738,0.25) 9(-5.738,-0.25) 10(-5.738,-0.75) 11(-5.738,-1.25) 12(-5.738,-1.75) 13(-5.738,-2.25) 14(-5.738,-2.75) 15(-5.738,-3.25) 16(-5.738,-3.75) 33(5.738,-3.75) 34(5.738,-3.25) 35(5.738,-2.75) 36(5.738,-2.25) 37(5.738,-1.75) 38(5.738,-1.25) 39(5.738,-0.75) 40(5.738,-0.25) 41(5.738,0.25) 42(5.738,0.75) 43(5.738,1.25) 44(5.738,1.75) 45(5.738,2.25) 46(5.738,2.75) 47(5.738,3.25) 48(5.738,3.75)
  rect 0.3x1.475 smd: 17(-3.75,-5.738) 18(-3.25,-5.738) 19(-2.75,-5.738) 20(-2.25,-5.738) 21(-1.75,-5.738) 22(-1.25,-5.738) 23(-0.75,-5.738) 24(-0.25,-5.738) 25(0.25,-5.738) 26(0.75,-5.738) 27(1.25,-5.738) 28(1.75,-5.738) 29(2.25,-5.738) 30(2.75,-5.738) 31(3.25,-5.738) 32(3.75,-5.738) 49(3.75,5.738) 50(3.25,5.738) 51(2.75,5.738) 52(2.25,5.738) 53(1.75,5.738) 54(1.25,5.738) 55(0.75,5.738) 56(0.25,5.738) 57(-0.25,5.738) 58(-0.75,5.738) 59(-1.25,5.738) 60(-1.75,5.738) 61(-2.25,5.738) 62(-2.75,5.738) 63(-3.25,5.738) 64(-3.75,5.738)
  silkscreen extent -6.35,-4.65 4.65,4.65, body extent -6,-6 6,6, height 1.6
RB161MM20TR [mm]
  rect 1.2x0.85 smd: 1(0,1.525) 2(0,-1.525)
  silkscreen extent -0.8,-0.8 0.8,2.45, body extent -0.8,-1.75 0.8,1.75, height 0.8
RB168MM40TFTR [mm]
  rect 1.2x0.85 smd: 1(0,1.525) 2(0,-1.525)
  silkscreen extent -0.8,-0.8 0.8,2.4, body extent -0.77,-1.72 0.77,1.72, height 0.75
RCLAMP3328PTZT [mm]
  rect 0.2x0.6 smd: 1(-1.7,-0.425) 2(-0.8,-0.425) 3(0,-0.425) 4(0.8,-0.425) 5(1.6,-0.425) 6(1.2,0.425) 7(0.4,0.425) 8(-0.4,0.425) 9(-1.3,0.425)
  silkscreen extent -1.75,-1.3 -1.65,-1.2, body extent -1.9,-0.5 1.9,0.5, height 0.5
RECE.20279.001E.01 [mm]
  rect 1.2x2.5 smd: 1(-1.685,0) 2(1.685,0)
  rect 1.15x1.2 smd: 3(0,-1.73)
  silkscreen extent -1.3,1.55 1.3,1.55, body extent -1.5,-1.76 1.5,1.24, height 1.34
RESC1005X35N [mm]
  rect 0.75x0.6 smd: 1(-0.55,0) 2(0.55,0)
  body extent -0.5,-0.25 0.5,0.25, height 0.35
RESC1005X40N [mm]
  rect 0.75x0.6 smd: 1(-0.55,0) 2(0.55,0)
  body extent -0.5,-0.25 0.5,0.25, height 0.4
RESC1608X55N [mm]
  rect 0.85x1 smd: 1(-0.75,0) 2(0.75,0)
  body extent -0.77,-0.43 0.77,0.43, height 0.55
RHDR8W80P0X254_1X8_2032X254X850P [mm]
  rect 1.5x1.5 hole 1: 1(0,0)
  round 1.5 hole 1: 2(2.54,0) 3(5.08,0) 4(7.62,0) 5(10.16,0) 6(12.7,0) 7(15.24,0) 8(17.78,0)
  silkscreen extent -1.27,-1.27 19.05,1.27, body extent -1.27,-1.27 19.05,1.27, height 8.5
SCD41DR2 [mm]
  rect 1.5x0.8 smd: 1(-4,2.5) 2(-4,1.25) 3(-4,0) 4(-4,-1.25) 5(-4,-2.5) 11(4,-2.5) 12(4,-1.25) 13(4,0) 14(4,1.25) 15(4,2.5)
  rect 0.8x1.5 smd: 6(-2.5,-4) 7(-1.25,-4) 8(0,-4) 9(1.25,-4) 10(2.5,-4) 16(2.5,4) 17(1.25,4) 18(0,4) 19(-1.25,4) 20(-2.5,4)
  rect 4.8x4.8 smd: 21(0,0)
  silkscreen extent -5.6,-5.05 5.05,5.05, body extent -5.05,-5.05 5.05,5.05, height 6.31
SOD3716X135N [mm]
  rect 1.15x0.8 smd: 1(-1.75,0) 2(1.75,0)
  silkscreen extent -2.32,-0.8 1.35,0.8, body extent -1.86,-0.8 1.86,0.8, height 1.35
SON40P220X200X80-11N [mm]
  rect 0.75x0.2 smd: 1(-1.1,0.8) 2(-1.1,0.4) 3(-1.1,0) 4(-1.1,-0.4) 5(-1.1,-0.8) 6(1.1,-0.8) 7(1.1,-0.4) 8(1.1,0) 9(1.1,0.4) 10(1.1,0.8)
  rect 1x1.6 smd: 11(0,0)
  silkscreen extent -1.6,1.28 -1.35,1.52, body extent -1.15,-1 1.15,1, height 0.8
SON50P250X250X80-11N-D [mm]
  rect 0.8x0.3 smd: 1(-1.25,1) 2(-1.25,0.5) 3(-1.25,0) 4(-1.25,-0.5) 5(-1.25,-1) 6(1.25,-1) 7(1.25,-0.5) 8(1.25,0) 9(1.25,0.5) 10(1.25,1)
  rect 1.3x2.1 smd: 11(0,0)
  silkscreen extent -1.77,1.52 -1.53,1.77, body extent -1.25,-1.25 1.25,1.25, height 0.77
SON80P150X150X59-5N [mm]
  rect 0.7x0.35 smd: 1(-0.8,0.4) 2(-0.8,-0.4) 3(0.8,-0.4) 4(0.8,0.4)
  rect 0.5x1.1 smd: 5(0,0)
  silkscreen extent -1.27,0.95 -1.02,1.2, body extent -0.8,-0.75 0.8,0.75, height 0.59
SON80P244X244X95-7N [mm]
  rect 0.75x0.45 smd: 1(-1.25,0.8) 2(-1.25,0) 3(-1.25,-0.8) 4(1.25,-0.8) 5(1.25,0) 6(1.25,0.8)
  rect 1.35x1.74 smd: 7(0,0)
  silkscreen extent -1.75,1.4 -1.5,1.65, body extent -1.27,-1.22 1.27,1.22, height 0.95
SOP65P640X120-8N [mm]
  rect 1.475x0.45 smd: 1(-2.938,0.975) 2(-2.938,0.325) 3(-2.938,-0.325) 4(-2.938,-0.975) 5(2.938,-0.975) 6(2.938,-0.325) 7(2.938,0.325) 8(2.938,0.975)
  silkscreen extent -3.67,-1.5 1.85,1.55, body extent -3.2,-1.5 3.2,1.5, height 1.2
SOT95P240X120-3N [mm]
  rect 1x0.7 smd: 1(-1.2,0.95) 2(-1.2,-0.95) 3(1.2,0)
  silkscreen extent -1.7,-1.46 0.35,1.55, body extent -1.2,-1.46 1.2,1.46, height 1.2
SOT95P280X145-6N [mm]
  rect 1.2x0.6 smd: 1(-1.25,0.95) 2(-1.25,0) 3(-1.25,-0.95) 4(1.25,-0.95) 5(1.25,0) 6(1.25,0.95)
  silkscreen extent -1.85,-1.45 0.3,1.6, body extent -1.4,-1.45 1.4,1.45, height 1.2
SOT95P284X110-6N [mm]
  rect 1.1x0.55 smd: 1(-1.3,0.95) 2(-1.3,0) 3(-1.3,-0.95) 4(1.3,-0.95) 5(1.3,0) 6(1.3,0.95)
  silkscreen extent -1.4,-1.51 0.4,1.8, body extent -1.43,-1.53 1.43,1.53, height 1
SOTFL95P240X88-3N [mm]
  rect 0.575x0.62 smd: 1(-1.188,0.95) 2(-1.188,-0.95) 3(1.188,0)
  silkscreen extent -1.48,-1.45 0.55,1.51, body extent -1.2,-1.45 1.2,1.45, height 0.88
SP0603-RIGHT [mm]
  rect 0.85x1 smd: 1(-0.75,0) 2(0.75,0) 3(-2.25,0)
  body extent -0.77,-0.43 0.77,0.43, height 0.55
SP320501ETG [mm]
  rect 0.35x0.6 smd: 1(-0.325,0) 2(0.325,0)
  silkscreen extent -1.1,-0.05 -1,0.05, body extent -0.5,-0.3 0.5,0.3, height 0.5
TH_CON_MHDR2X5_PIT50_KEY [mil]
  rrect50% 40x40 hole 24: 1(-100,-25)
  round 40 hole 24: 2(-100,25) 3(-50,-25) 4(-50,25) 5(0,-25) 6(0,25) 7(50,-25) 8(50,25) 9(100,-25) 10(100,25)
  silkscreen extent -249,-101 249,100, body extent -249,-102 249,100, height 213
TH_MH3.2/3.4NP [mm]
  round 0.1 hole 3.2 unplated paste-2539.97 mask+1.65: ""(0,0)
  body extent -1.8,-1.8 1.8,1.8, height 0.05